# Altium PCB Pedal_XLR.PcbDoc (part 1 of 2)
Units mm, origin at the board's own origin, x right, y up, seen from the top; angles counter-clockwise.
Board outline 129.71 x 40 mm, 4 copper layers (Top Layer, Layer 1, Layer 2, Bottom Layer), stack 1.191 mm thick; 173 components, 126 nets, 550 pads, 107 vias.
Unrouted connection lines stored in the file: 71.
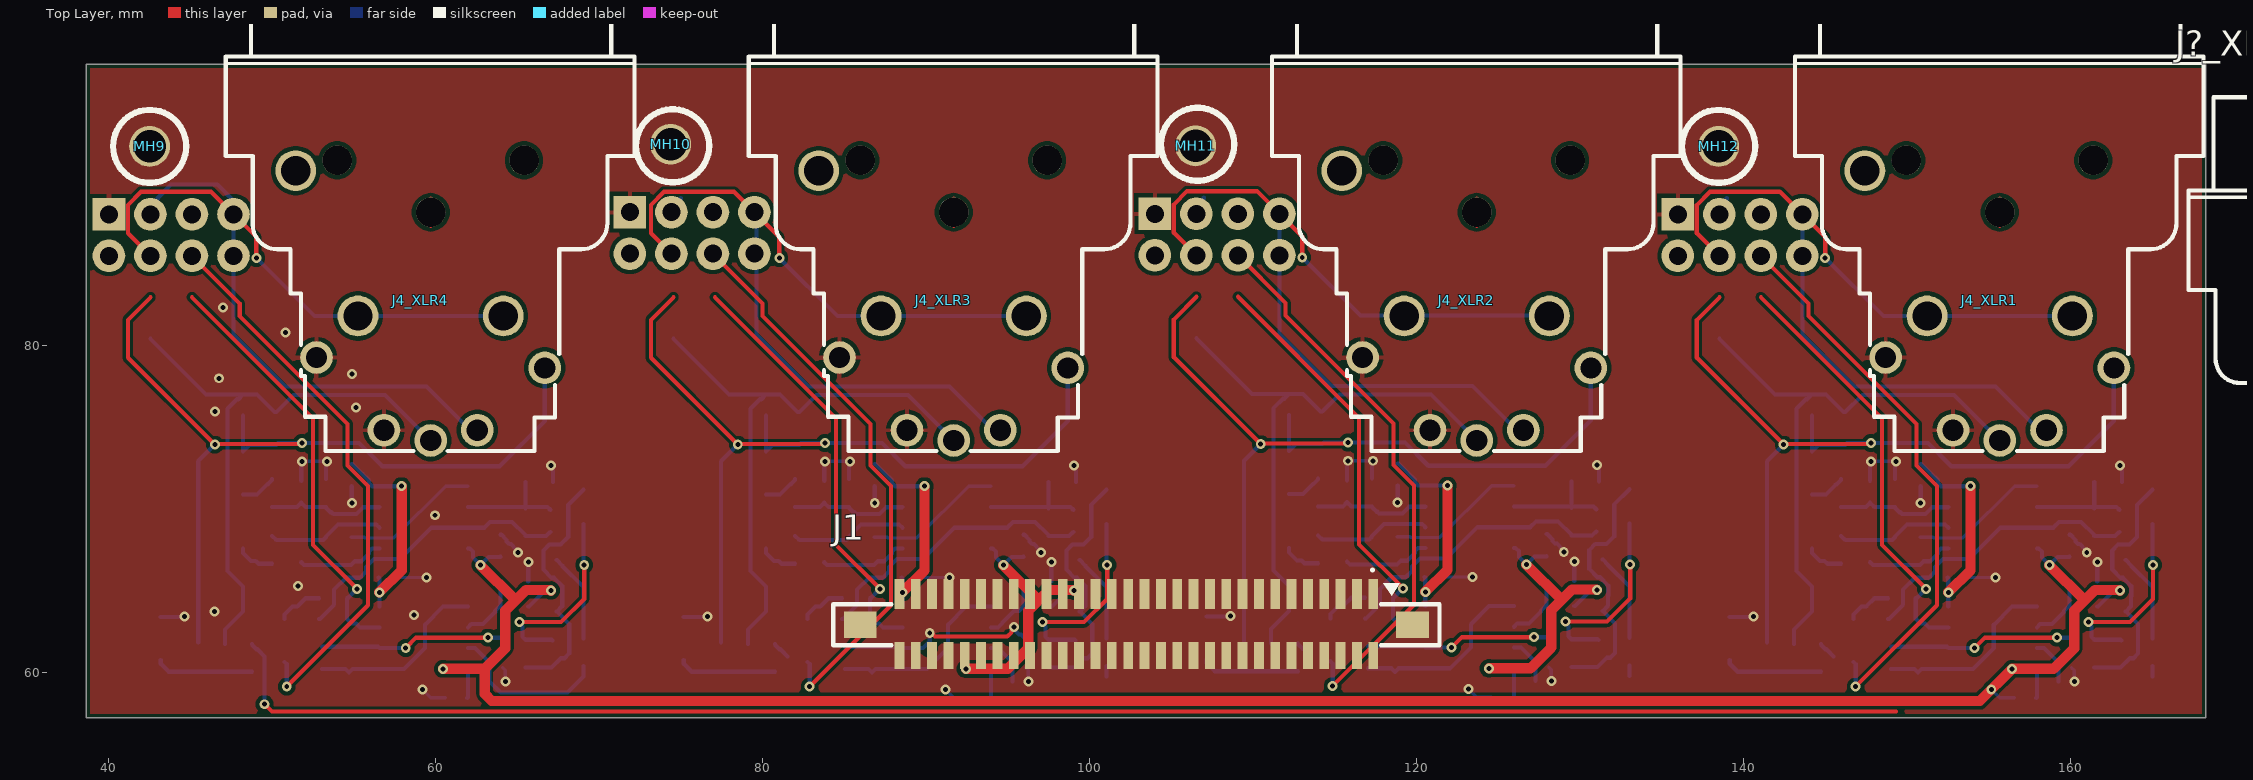
[diagram p0: Top Layer view]
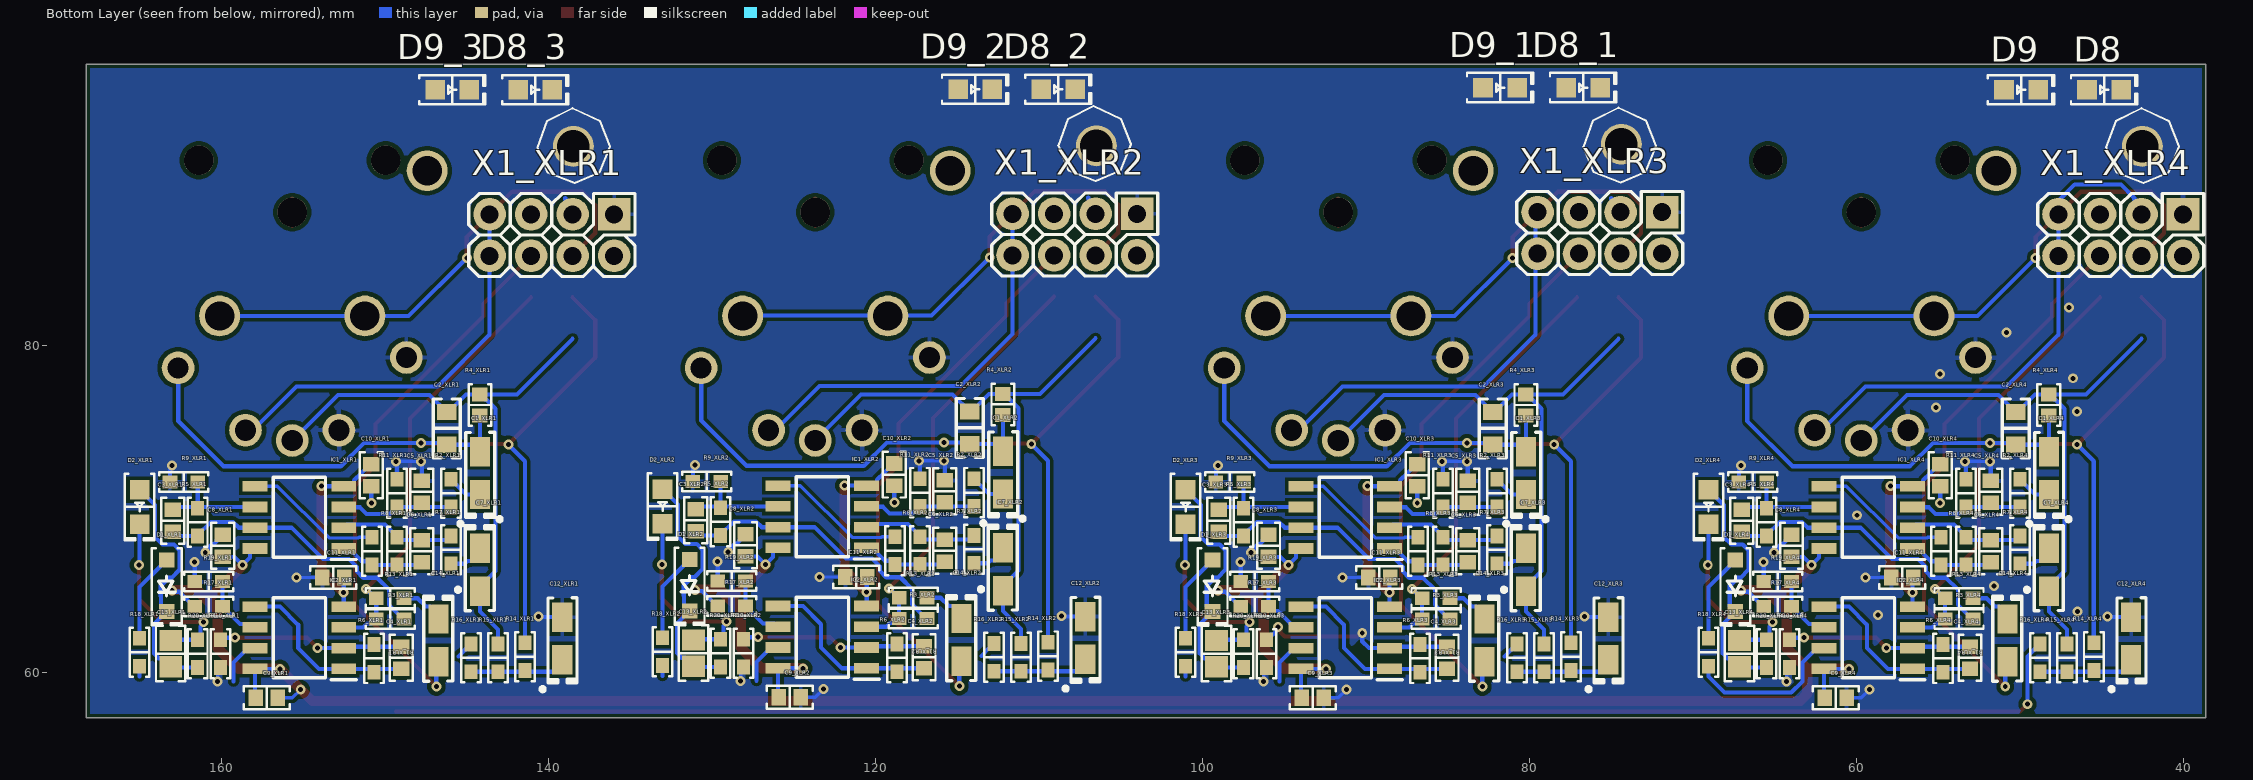
[diagram p1: Bottom Layer view, seen from below]

## Layer stack, top to bottom
Top Solder: solder mask 0.0102, Solder Resist, Dk 3.5
Top Layer: signal copper 0.0356
Dielectric 2: prepreg 0.35, PP-006, Dk 4.1
Layer 1: signal copper 0.035
Dielectric 1: dielectric 0.35, FR-4, Dk 4.8
Layer 2: signal copper 0.035
Dielectric 3: prepreg 0.35, PP-006, Dk 4.1
Bottom Layer: signal copper 0.0356
Bottom Solder: solder mask 0.0102, Solder Resist, Dk 3.5

## Board outline
38.608,57.201 38.608,97.201 168.315,97.201 168.315,57.201

## Design rules (kind name [scope] priority, off if disabled: settings)
BoardOutlineClearance [All] p1: gap=0.254 ignorepadtopadclearanceinfootprint=FALSE except(0: Arc-SplitContinuation Track-SplitContinuation SMDPad-SplitContinuation THPad-SplitContinuation Via-SplitContinuation Fill-SplitContinuation Poly-SplitContinuation Region-SplitContinuation Text-SplitContinuation)
Clearance [All] p1: gap=0.254 ignorepadtopadclearanceinfootprint=FALSE except(0.203: Arc-Arc Arc-Track Arc-SMDPad Arc-Fill Arc-Poly Arc-Region Track-Track Track-SMDPad Track-Fill Track-Poly Track-Region SMDPad-SMDPad SMDPad-Fill SMDPad-Poly SMDPad-Region)
PolygonConnect [All] p1: thpad.connectstyle=Relief thpad.reliefconductorwidth=0.254 thpad.reliefentries=4 thpad.polygonreliefangle="90 Angle" thpad.airgapwidth=0.254 smdpad.connectstyle=Relief smdpad.reliefconductorwidth=0.254 smdpad.reliefentries=4 smdpad.polygonreliefangle="90 Angle" smdpad.airgapwidth=0.254 via.connectstyle=Direct via.reliefconductorwidth=0.254 via.reliefentries=4 via.polygonreliefangle="90 Angle" via.airgapwidth=0.254
RoomDefinition XLR3 [InComponentClass('XLR3')] p1: confinementstyle=ConfineIn formatcopy=TRUE lockcomponents=FALSE outline 72.921,78.767 72.921,89.635 78.774,89.635 78.774,105.536 104.536,105.536 104.536,72.815 102.272,72.815 102.272,67.743 102.022,67.743 102.022,59.385 100.367,59.385 100.367,59.096 95.268,59.096 95.268,59.074 94.985,59.074 94.985,57.391 91.527,57.391 91.527,58.45 73.801,58.45 73.801,78.767
RoomDefinition XLR4 [InComponentClass('XLR4')] p2: confinementstyle=ConfineIn formatcopy=TRUE lockcomponents=FALSE outline 40.921,78.767 40.921,89.635 46.774,89.635 46.774,105.536 72.536,105.536 72.536,72.815 70.272,72.815 70.272,67.743 70.022,67.743 70.022,59.385 68.367,59.385 68.367,59.096 63.268,59.096 63.268,59.074 62.985,59.074 62.985,57.391 59.527,57.391 59.527,58.45 41.801,58.45 41.801,78.767
RoomDefinition XLR2 [InComponentClass('XLR2')] p3: confinementstyle=ConfineIn formatcopy=TRUE lockcomponents=FALSE outline 104.921,78.799 104.921,89.667 110.774,89.667 110.774,105.568 136.536,105.568 136.536,72.847 134.272,72.847 134.272,67.775 134.022,67.775 134.022,59.417 132.367,59.417 132.367,59.128 127.268,59.128 127.268,59.106 126.985,59.106 126.985,57.423 123.527,57.423 123.527,58.482 105.801,58.482 105.801,78.799
RoomDefinition XLR1 [InComponentClass('XLR1')] p4: confinementstyle=ConfineIn formatcopy=TRUE lockcomponents=FALSE outline 136.921,78.767 136.921,89.635 142.774,89.635 142.774,105.536 168.536,105.536 168.536,72.815 166.272,72.815 166.272,67.743 166.022,67.743 166.022,59.385 164.367,59.385 164.367,59.096 159.268,59.096 159.268,59.074 158.985,59.074 158.985,57.391 155.527,57.391 155.527,58.45 137.801,58.45 137.801,78.767
RoutingVias [All] p1: holewidth=0.305 width=0.61 viastyle="Through Hole" minholewidth=0.305 minwidth=0.61 maxholewidth=0.305 maxwidth=0.61
SolderMaskExpansion [All] p1: expansion=0.102 istentingtop=FALSE
Width [All] p1: maxlimit=0.635 minlimit=0.203 preferedwidth=0.203
30 further rules are at their usual default settings.

## Classes and differential pairs
channel class XLR: XLR1 XLR2 XLR3 XLR4
component class XLR4: C1_XLR4 C2_XLR4 C3_XLR4 C4_XLR4 C5_XLR4 C6_XLR4 C7_XLR4 C8_XLR4 C9_XLR4 C10_XLR4 C11_XLR4 C12_XLR4 C13_XLR4 C14_XLR4 D1_XLR4 D2_XLR4 IC1_XLR4 IC2_XLR4 J4_XLR4 R1_XLR4 R2_XLR4 R3_XLR4 R4_XLR4 R5_XLR4 R6_XLR4 R7_XLR4 R8_XLR4 R9_XLR4 R10_XLR4 R11_XLR4 R13_XLR4 R14_XLR4 R15_XLR4 R16_XLR4 R17_XLR4 R18_XLR4 R19_XLR4 R20_XLR4 X1_XLR4
component class XLR3: C1_XLR3 C2_XLR3 C3_XLR3 C4_XLR3 C5_XLR3 C6_XLR3 C7_XLR3 C8_XLR3 C9_XLR3 C10_XLR3 C11_XLR3 C12_XLR3 C13_XLR3 C14_XLR3 D1_XLR3 D2_XLR3 IC1_XLR3 IC2_XLR3 J4_XLR3 R1_XLR3 R2_XLR3 R3_XLR3 R4_XLR3 R5_XLR3 R6_XLR3 R7_XLR3 R8_XLR3 R9_XLR3 R10_XLR3 R11_XLR3 R13_XLR3 R14_XLR3 R15_XLR3 R16_XLR3 R17_XLR3 R18_XLR3 R19_XLR3 R20_XLR3 X1_XLR3
component class XLR2: C1_XLR2 C2_XLR2 C3_XLR2 C4_XLR2 C5_XLR2 C6_XLR2 C7_XLR2 C8_XLR2 C9_XLR2 C10_XLR2 C11_XLR2 C12_XLR2 C13_XLR2 C14_XLR2 D1_XLR2 D2_XLR2 IC1_XLR2 IC2_XLR2 J4_XLR2 R1_XLR2 R2_XLR2 R3_XLR2 R4_XLR2 R5_XLR2 R6_XLR2 R7_XLR2 R8_XLR2 R9_XLR2 R10_XLR2 R11_XLR2 R13_XLR2 R14_XLR2 R15_XLR2 R16_XLR2 R17_XLR2 R18_XLR2 R19_XLR2 R20_XLR2 X1_XLR2
component class XLR1: C1_XLR1 C2_XLR1 C3_XLR1 C4_XLR1 C5_XLR1 C6_XLR1 C7_XLR1 C8_XLR1 C9_XLR1 C10_XLR1 C11_XLR1 C12_XLR1 C13_XLR1 C14_XLR1 D1_XLR1 D2_XLR1 IC1_XLR1 IC2_XLR1 J4_XLR1 R1_XLR1 R2_XLR1 R3_XLR1 R4_XLR1 R5_XLR1 R6_XLR1 R7_XLR1 R8_XLR1 R9_XLR1 R10_XLR1 R11_XLR1 R13_XLR1 R14_XLR1 R15_XLR1 R16_XLR1 R17_XLR1 R18_XLR1 R19_XLR1 R20_XLR1 X1_XLR1
component class Pedal_XLR: J1

## Components (designator, comment, footprint, x,y, rotation, side; value= is the part's Value field where it differs from the comment)
C1_XLR1 "10µF" "CAP POL 1206_3216" 144.215,72.176 r90 bottom (schematic designator C1)
C1_XLR2 "10µF" "CAP POL 1206_3216" 112.215,72.208 r90 bottom (schematic designator C1)
C1_XLR3 "10µF" "CAP POL 1206_3216" 80.215,72.176 r90 bottom (schematic designator C1)
C1_XLR4 "10µF" "CAP POL 1206_3216" 48.215,72.176 r90 bottom (schematic designator C1)
C2_XLR1 "10000 pF" "MURATA GRM188 0603_1608" 146.247,74.914 r270 bottom (schematic designator C2)
C2_XLR2 "10000 pF" "MURATA GRM188 0603_1608" 114.247,74.946 r270 bottom (schematic designator C2)
C2_XLR3 "10000 pF" "MURATA GRM188 0603_1608" 82.247,74.914 r270 bottom (schematic designator C2)
C2_XLR4 "10000 pF" "MURATA GRM188 0603_1608" 50.247,74.914 r270 bottom (schematic designator C2)
C3_XLR1 "22 pF" "CAP 0603_1608" 163.011,69.255 r90 bottom (schematic designator C3)
C3_XLR2 "22 pF" "CAP 0603_1608" 131.011,69.287 r90 bottom (schematic designator C3)
C3_XLR3 "22 pF" "CAP 0603_1608" 99.011,69.255 r90 bottom (schematic designator C3)
C3_XLR4 "22 pF" "CAP 0603_1608" 67.011,69.255 r90 bottom (schematic designator C3)
C4_XLR1 "22 pF" "CAP 0603_1608" 149.041,60.873 r90 bottom (schematic designator C4)
C4_XLR2 "22 pF" "CAP 0603_1608" 117.041,60.905 r90 bottom (schematic designator C4)
C4_XLR3 "22 pF" "CAP 0603_1608" 85.041,60.873 r90 bottom (schematic designator C4)
C4_XLR4 "22 pF" "CAP 0603_1608" 53.041,60.873 r90 bottom (schematic designator C4)
C5_XLR1 "22 pF" "CAP 0603_1608" 147.771,71.033 r270 bottom (schematic designator C5)
C5_XLR2 "22 pF" "CAP 0603_1608" 115.771,71.065 r270 bottom (schematic designator C5)
C5_XLR3 "22 pF" "CAP 0603_1608" 83.771,71.033 r270 bottom (schematic designator C5)
C5_XLR4 "22 pF" "CAP 0603_1608" 51.771,71.033 r270 bottom (schematic designator C5)
C6_XLR1 "22 pF" "CAP 0603_1608" 147.771,67.397 r90 bottom (schematic designator C6)
C6_XLR2 "22 pF" "CAP 0603_1608" 115.771,67.429 r90 bottom (schematic designator C6)
C6_XLR3 "22 pF" "CAP 0603_1608" 83.771,67.397 r90 bottom (schematic designator C6)
C6_XLR4 "22 pF" "CAP 0603_1608" 51.771,67.397 r90 bottom (schematic designator C6)
C7_XLR1 "10µF" "CAP POL 1206_3216" 144.215,66.254 r270 bottom (schematic designator C7)
C7_XLR2 "10µF" "CAP POL 1206_3216" 112.215,66.286 r270 bottom (schematic designator C7)
C7_XLR3 "10µF" "CAP POL 1206_3216" 80.215,66.254 r270 bottom (schematic designator C7)
C7_XLR4 "10µF" "CAP POL 1206_3216" 48.215,66.254 r270 bottom (schematic designator C7)
C8_XLR1 "0.1 µF" "CAP 0603_1608" 159.963,67.731 r90 bottom (schematic designator C8)
C8_XLR2 "0.1 µF" "CAP 0603_1608" 127.963,67.763 r90 bottom (schematic designator C8)
C8_XLR3 "0.1 µF" "CAP 0603_1608" 95.963,67.731 r90 bottom (schematic designator C8)
C8_XLR4 "0.1 µF" "CAP 0603_1608" 63.963,67.731 r90 bottom (schematic designator C8)
C9_XLR1 "0.1 µF" "CAP 0603_1608" 157.256,58.42 r180 bottom (schematic designator C9)
C9_XLR2 "0.1 µF" "CAP 0603_1608" 125.256,58.452 r180 bottom (schematic designator C9)
C9_XLR3 "0.1 µF" "CAP 0603_1608" 93.256,58.42 r180 bottom (schematic designator C9)
C9_XLR4 "0.1 µF" "CAP 0603_1608" 61.256,58.42 r180 bottom (schematic designator C9)
C10_XLR1 "0.1 µF" "CAP 0603_1608" 150.864,72.049 r90 bottom (schematic designator C10)
C10_XLR2 "0.1 µF" "CAP 0603_1608" 118.864,72.081 r90 bottom (schematic designator C10)
C10_XLR3 "0.1 µF" "CAP 0603_1608" 86.864,72.049 r90 bottom (schematic designator C10)
C10_XLR4 "0.1 µF" "CAP 0603_1608" 54.864,72.049 r90 bottom (schematic designator C10)
C11_XLR1 "0.1 µF" "CAP 0603_1608" 153.192,65.786 r180 bottom (schematic designator C11)
C11_XLR2 "0.1 µF" "CAP 0603_1608" 121.192,65.818 r180 bottom (schematic designator C11)
C11_XLR3 "0.1 µF" "CAP 0603_1608" 89.192,65.786 r180 bottom (schematic designator C11)
C11_XLR4 "0.1 µF" "CAP 0603_1608" 57.192,65.786 r180 bottom (schematic designator C11)
C12_XLR1 "10µF" "CAP POL 1206_3216" 139.18,62.054 r90 bottom (schematic designator C12)
C12_XLR2 "10µF" "CAP POL 1206_3216" 107.18,62.086 r90 bottom (schematic designator C12)
C12_XLR3 "10µF" "CAP POL 1206_3216" 75.18,62.054 r90 bottom (schematic designator C12)
C12_XLR4 "10µF" "CAP POL 1206_3216" 43.18,62.054 r90 bottom (schematic designator C12)
C13_XLR1 "1 µF" "CAP 0805_2012" 163.138,61.125 r270 bottom (schematic designator C13)
C13_XLR2 "1 µF" "CAP 0805_2012" 131.138,61.157 r270 bottom (schematic designator C13)
C13_XLR3 "1 µF" "CAP 0805_2012" 99.138,61.125 r270 bottom (schematic designator C13)
C13_XLR4 "1 µF" "CAP 0805_2012" 67.138,61.125 r270 bottom (schematic designator C13)
C14_XLR1 "10µF" "CAP POL 1206_3216" 146.755,61.936 r270 bottom (schematic designator C14)
C14_XLR2 "10µF" "CAP POL 1206_3216" 114.755,61.968 r270 bottom (schematic designator C14)
C14_XLR3 "10µF" "CAP POL 1206_3216" 82.755,61.936 r270 bottom (schematic designator C14)
C14_XLR4 "10µF" "CAP POL 1206_3216" 50.755,61.936 r270 bottom (schematic designator C14)
D1_XLR1 "1N4148W-TP" SOD-123 163.392,65.278 r270 bottom (schematic designator D1)
D1_XLR2 "1N4148W-TP" SOD-123 131.392,65.31 r270 bottom (schematic designator D1)
D1_XLR3 "1N4148W-TP" SOD-123 99.392,65.278 r270 bottom (schematic designator D1)
D1_XLR4 "1N4148W-TP" SOD-123 67.392,65.278 r270 bottom (schematic designator D1)
D2_XLR1 "Red" "LED 0805_2012 RED" 165.043,70.104 r270 bottom (schematic designator D2)
D2_XLR2 "Red" "LED 0805_2012 RED" 133.043,70.136 r270 bottom (schematic designator D2)
D2_XLR3 "Red" "LED 0805_2012 RED" 101.043,70.104 r270 bottom (schematic designator D2)
D2_XLR4 "Red" "LED 0805_2012 RED" 69.043,70.104 r270 bottom (schematic designator D2)
D8 "Red" "LED 0805_2012 RED" 44.831,95.631 r180 bottom
D8_1 "Red" "LED 0805_2012 RED" 76.708,95.758 r180 bottom
D8_2 "Red" "LED 0805_2012 RED" 108.831,95.663 r180 bottom
D8_3 "Red" "LED 0805_2012 RED" 140.831,95.631 r180 bottom
D9 "Red" "LED 0805_2012 RED" 49.911,95.631 r180 bottom
D9_1 "Red" "LED 0805_2012 RED" 81.788,95.758 r180 bottom
D9_2 "Red" "LED 0805_2012 RED" 113.911,95.663 r180 bottom
D9_3 "Red" "LED 0805_2012 RED" 145.911,95.631 r180 bottom
IC1_XLR1 "NE5532DRE4" SOIC127P600X175-8N 155.264,69.469 r0 bottom (schematic designator IC1)
IC1_XLR2 "NE5532DRE4" SOIC127P600X175-8N 123.264,69.501 r0 bottom (schematic designator IC1)
IC1_XLR3 "NE5532DRE4" SOIC127P600X175-8N 91.264,69.469 r0 bottom (schematic designator IC1)
IC1_XLR4 "NE5532DRE4" SOIC127P600X175-8N 59.264,69.469 r0 bottom (schematic designator IC1)
IC2_XLR1 "NE5532DRE4" SOIC127P600X175-8N 155.264,62.103 r0 bottom (schematic designator IC2)
IC2_XLR2 "NE5532DRE4" SOIC127P600X175-8N 123.264,62.135 r0 bottom (schematic designator IC2)
IC2_XLR3 "NE5532DRE4" SOIC127P600X175-8N 91.264,62.103 r0 bottom (schematic designator IC2)
IC2_XLR4 "NE5532DRE4" SOIC127P600X175-8N 59.264,62.103 r0 bottom (schematic designator IC2)
J1 "3-1734248-0" 317342480 102.87,63.246 r0 top
J4_XLR1 "NCJ6FA-H" NCJ6FA-H 155.702,88.138 r0 top locked (schematic designator J4)
J4_XLR2 "NCJ6FA-H" NCJ6FA-H 123.698,88.138 r0 top locked (schematic designator J4)
J4_XLR3 "NCJ6FA-H" NCJ6FA-H 91.694,88.138 r0 top locked (schematic designator J4)
J4_XLR4 "NCJ6FA-H" NCJ6FA-H 59.69,88.138 r0 top locked (schematic designator J4)
J?_XLR1 "NCJ6FA-H" ACJC10HL 179.789,79.952 r0 top (schematic designator J?)
J?_XLR2 "NCJ6FA-H" ACJC10HL 183.007,118.516 r180 top (schematic designator J?)
J?_XLR3 "NCJ6FA-H" ACJC10HL 183.007,161.519 r180 top (schematic designator J?)
J?_XLR4 "NCJ6FA-H" ACJC10HL 183.007,204.521 r180 top (schematic designator J?)
MH9 "MountingHole" Hole_2.5mm 42.498,92.168 r0 top
MH10 "MountingHole" Hole_2.5mm 74.375,92.295 r0 top
MH11 "MountingHole" Hole_2.5mm 106.498,92.2 r0 top
MH12 "MountingHole" Hole_2.5mm 138.498,92.168 r0 top
R1_XLR1 "510 Ohms" "YAGEO RES 0603_1608" 150.819,67.398 r90 bottom (schematic designator R1)
R1_XLR2 "510 Ohms" "YAGEO RES 0603_1608" 118.819,67.43 r90 bottom (schematic designator R1)
R1_XLR3 "510 Ohms" "YAGEO RES 0603_1608" 86.819,67.398 r90 bottom (schematic designator R1)
R1_XLR4 "510 Ohms" "YAGEO RES 0603_1608" 54.819,67.398 r90 bottom (schematic designator R1)
R2_XLR1 "510 Ohms" "YAGEO RES 0603_1608" 145.993,70.954 r270 bottom (schematic designator R2)
R2_XLR2 "510 Ohms" "YAGEO RES 0603_1608" 113.993,70.986 r270 bottom (schematic designator R2)
R2_XLR3 "510 Ohms" "YAGEO RES 0603_1608" 81.993,70.954 r270 bottom (schematic designator R2)
R2_XLR4 "510 Ohms" "YAGEO RES 0603_1608" 49.993,70.954 r270 bottom (schematic designator R2)
R3_XLR1 "5.1 kOhms" "YAGEO RES 0603_1608" 149.715,63.246 r0 bottom (schematic designator R3)
R3_XLR2 "5.1 kOhms" "YAGEO RES 0603_1608" 117.715,63.278 r0 bottom (schematic designator R3)
R3_XLR3 "5.1 kOhms" "YAGEO RES 0603_1608" 85.715,63.246 r0 bottom (schematic designator R3)
R3_XLR4 "5.1 kOhms" "YAGEO RES 0603_1608" 53.715,63.246 r0 bottom (schematic designator R3)
R4_XLR1 "" "RES 0603_1608" 144.215,76.342 r90 bottom value="1 MOhms" (schematic designator R4)
R4_XLR2 "" "RES 0603_1608" 112.215,76.374 r90 bottom value="1 MOhms" (schematic designator R4)
R4_XLR3 "" "RES 0603_1608" 80.215,76.342 r90 bottom value="1 MOhms" (schematic designator R4)
R4_XLR4 "" "RES 0603_1608" 48.215,76.342 r90 bottom value="1 MOhms" (schematic designator R4)
R5_XLR1 "150 kOhms" "YAGEO RES 0603_1608" 161.487,69.176 r270 bottom (schematic designator R5)
R5_XLR2 "150 kOhms" "YAGEO RES 0603_1608" 129.487,69.208 r270 bottom (schematic designator R5)
R5_XLR3 "150 kOhms" "YAGEO RES 0603_1608" 97.487,69.176 r270 bottom (schematic designator R5)
R5_XLR4 "150 kOhms" "YAGEO RES 0603_1608" 65.487,69.176 r270 bottom (schematic designator R5)
R6_XLR1 "5.1 kOhms" "YAGEO RES 0603_1608" 150.692,60.833 r270 bottom (schematic designator R6)
R6_XLR2 "5.1 kOhms" "YAGEO RES 0603_1608" 118.692,60.865 r270 bottom (schematic designator R6)
R6_XLR3 "5.1 kOhms" "YAGEO RES 0603_1608" 86.692,60.833 r270 bottom (schematic designator R6)
R6_XLR4 "5.1 kOhms" "YAGEO RES 0603_1608" 54.692,60.833 r270 bottom (schematic designator R6)
R7_XLR1 "510 Ohms" "YAGEO RES 0603_1608" 145.993,67.476 r90 bottom (schematic designator R7)
R7_XLR2 "510 Ohms" "YAGEO RES 0603_1608" 113.993,67.508 r90 bottom (schematic designator R7)
R7_XLR3 "510 Ohms" "YAGEO RES 0603_1608" 81.993,67.476 r90 bottom (schematic designator R7)
R7_XLR4 "510 Ohms" "YAGEO RES 0603_1608" 49.993,67.476 r90 bottom (schematic designator R7)
R8_XLR1 "51 kOhms" "YAGEO RES 0603_1608" 149.295,67.398 r90 bottom (schematic designator R8)
R8_XLR2 "51 kOhms" "YAGEO RES 0603_1608" 117.295,67.43 r90 bottom (schematic designator R8)
R8_XLR3 "51 kOhms" "YAGEO RES 0603_1608" 85.295,67.398 r90 bottom (schematic designator R8)
R8_XLR4 "51 kOhms" "YAGEO RES 0603_1608" 53.295,67.398 r90 bottom (schematic designator R8)
R9_XLR1 "510 Ohms" "YAGEO RES 0603_1608" 162.337,71.628 r180 bottom (schematic designator R9)
R9_XLR2 "510 Ohms" "YAGEO RES 0603_1608" 130.337,71.66 r180 bottom (schematic designator R9)
R9_XLR3 "510 Ohms" "YAGEO RES 0603_1608" 98.337,71.628 r180 bottom (schematic designator R9)
R9_XLR4 "510 Ohms" "YAGEO RES 0603_1608" 66.337,71.628 r180 bottom (schematic designator R9)
R10_XLR1 "5.1 kOhms" "YAGEO RES 0603_1608" 160.09,61.126 r90 bottom (schematic designator R10)
R10_XLR2 "5.1 kOhms" "YAGEO RES 0603_1608" 128.09,61.158 r90 bottom (schematic designator R10)
R10_XLR3 "5.1 kOhms" "YAGEO RES 0603_1608" 96.09,61.126 r90 bottom (schematic designator R10)
R10_XLR4 "5.1 kOhms" "YAGEO RES 0603_1608" 64.09,61.126 r90 bottom (schematic designator R10)
R11_XLR1 "51 kOhms" "YAGEO RES 0603_1608" 149.295,70.954 r270 bottom (schematic designator R11)
R11_XLR2 "51 kOhms" "YAGEO RES 0603_1608" 117.295,70.986 r270 bottom (schematic designator R11)
R11_XLR3 "51 kOhms" "YAGEO RES 0603_1608" 85.295,70.954 r270 bottom (schematic designator R11)
R11_XLR4 "51 kOhms" "YAGEO RES 0603_1608" 53.295,70.954 r270 bottom (schematic designator R11)
R13_XLR1 "5.1 kOhms" "YAGEO RES 0603_1608" 149.715,64.516 r0 bottom (schematic designator R13)
R13_XLR2 "5.1 kOhms" "YAGEO RES 0603_1608" 117.715,64.548 r0 bottom (schematic designator R13)
R13_XLR3 "5.1 kOhms" "YAGEO RES 0603_1608" 85.715,64.516 r0 bottom (schematic designator R13)
R13_XLR4 "5.1 kOhms" "YAGEO RES 0603_1608" 53.715,64.516 r0 bottom (schematic designator R13)
R14_XLR1 "5.1 kOhms" "YAGEO RES 0603_1608" 141.466,60.95 r270 bottom (schematic designator R14)
R14_XLR2 "5.1 kOhms" "YAGEO RES 0603_1608" 109.466,60.982 r270 bottom (schematic designator R14)
R14_XLR3 "5.1 kOhms" "YAGEO RES 0603_1608" 77.466,60.95 r270 bottom (schematic designator R14)
R14_XLR4 "5.1 kOhms" "YAGEO RES 0603_1608" 45.466,60.95 r270 bottom (schematic designator R14)
R15_XLR1 "5.1 kOhms" "YAGEO RES 0603_1608" 143.117,60.872 r270 bottom (schematic designator R15)
R15_XLR2 "5.1 kOhms" "YAGEO RES 0603_1608" 111.117,60.904 r270 bottom (schematic designator R15)
R15_XLR3 "5.1 kOhms" "YAGEO RES 0603_1608" 79.117,60.872 r270 bottom (schematic designator R15)
R15_XLR4 "5.1 kOhms" "YAGEO RES 0603_1608" 47.117,60.872 r270 bottom (schematic designator R15)
R16_XLR1 "510 Ohms" "YAGEO RES 0603_1608" 144.768,60.872 r90 bottom (schematic designator R16)
R16_XLR2 "510 Ohms" "YAGEO RES 0603_1608" 112.768,60.904 r90 bottom (schematic designator R16)
R16_XLR3 "510 Ohms" "YAGEO RES 0603_1608" 80.768,60.872 r90 bottom (schematic designator R16)
R16_XLR4 "510 Ohms" "YAGEO RES 0603_1608" 48.768,60.872 r90 bottom (schematic designator R16)
R17_XLR1 "51 kOhms" "YAGEO RES 0603_1608" 160.813,64.008 r180 bottom (schematic designator R17)
R17_XLR2 "51 kOhms" "YAGEO RES 0603_1608" 128.813,64.04 r180 bottom (schematic designator R17)
R17_XLR3 "51 kOhms" "YAGEO RES 0603_1608" 96.813,64.008 r180 bottom (schematic designator R17)
R17_XLR4 "51 kOhms" "YAGEO RES 0603_1608" 64.813,64.008 r180 bottom (schematic designator R17)
R18_XLR1 "510 Ohms" "YAGEO RES 0603_1608" 165.043,61.214 r90 bottom (schematic designator R18)
R18_XLR2 "510 Ohms" "YAGEO RES 0603_1608" 133.043,61.246 r90 bottom (schematic designator R18)
R18_XLR3 "510 Ohms" "YAGEO RES 0603_1608" 101.043,61.214 r90 bottom (schematic designator R18)
R18_XLR4 "510 Ohms" "YAGEO RES 0603_1608" 69.043,61.214 r90 bottom (schematic designator R18)
R19_XLR1 "51 kOhms" "YAGEO RES 0603_1608" 160.813,65.532 r0 bottom (schematic designator R19)
R19_XLR2 "51 kOhms" "YAGEO RES 0603_1608" 128.813,65.564 r0 bottom (schematic designator R19)
R19_XLR3 "51 kOhms" "YAGEO RES 0603_1608" 96.813,65.532 r0 bottom (schematic designator R19)
R19_XLR4 "51 kOhms" "YAGEO RES 0603_1608" 64.813,65.532 r0 bottom (schematic designator R19)
R20_XLR1 "5.1 kOhms" "YAGEO RES 0603_1608" 161.487,61.126 r270 bottom (schematic designator R20)
R20_XLR2 "5.1 kOhms" "YAGEO RES 0603_1608" 129.487,61.158 r270 bottom (schematic designator R20)
R20_XLR3 "5.1 kOhms" "YAGEO RES 0603_1608" 97.487,61.126 r270 bottom (schematic designator R20)
R20_XLR4 "5.1 kOhms" "YAGEO RES 0603_1608" 65.487,61.126 r270 bottom (schematic designator R20)
X1_XLR1 "Connector, 8pin, 2.54mm, 500VAC, 3A" "CON: PLD-8" 139.815,86.741 r0 bottom (schematic designator X1)
X1_XLR2 "Connector, 8pin, 2.54mm, 500VAC, 3A" "CON: PLD-8" 107.815,86.773 r0 bottom (schematic designator X1)
X1_XLR3 "Connector, 8pin, 2.54mm, 500VAC, 3A" "CON: PLD-8" 75.692,86.868 r0 bottom (schematic designator X1)
X1_XLR4 "Connector, 8pin, 2.54mm, 500VAC, 3A" "CON: PLD-8" 43.815,86.741 r0 bottom (schematic designator X1)

## Footprints (in the part's own frame and the unit in brackets; to place one, negate y for a bottom-side part, rotate by r counter-clockwise, add the part's x,y. Pads: shape width x height; smd on the part's side, far side on the other; paste and mask are expansions set on the pad)
317342480 [mm]
  rect 0.6x1.85 smd: 1(14.5,1.525) 3(13.5,1.525) 5(12.5,1.525) 7(11.5,1.525) 9(10.5,1.525) 11(9.5,1.525) 13(8.5,1.525) 15(7.5,1.525) 17(6.5,1.525) 19(5.5,1.525) 21(4.5,1.525) 23(3.5,1.525) 25(2.5,1.525) 27(1.5,1.525) 29(0.5,1.525) 31(-0.5,1.525) 33(-1.5,1.525) 35(-2.5,1.525) 37(-3.5,1.525) 39(-4.5,1.525) 41(-5.5,1.525) 43(-6.5,1.525) 45(-7.5,1.525) 47(-8.5,1.525) 49(-9.5,1.525) 51(-10.5,1.525) 53(-11.5,1.525) 55(-12.5,1.525) 57(-13.5,1.525) 59(-14.5,1.525)
  rect 0.6x1.65 smd: 2(14.5,-2.225) 4(13.5,-2.225) 6(12.5,-2.225) 8(11.5,-2.225) 10(10.5,-2.225) 12(9.5,-2.225) 14(8.5,-2.225) 16(7.5,-2.225) 18(6.5,-2.225) 20(5.5,-2.225) 22(4.5,-2.225) 24(3.5,-2.225) 26(2.5,-2.225) 28(1.5,-2.225) 30(0.5,-2.225) 32(-0.5,-2.225) 34(-1.5,-2.225) 36(-2.5,-2.225) 38(-3.5,-2.225) 40(-4.5,-2.225) 42(-5.5,-2.225) 44(-6.5,-2.225) 46(-7.5,-2.225) 48(-8.5,-2.225) 50(-9.5,-2.225) 52(-10.5,-2.225) 54(-11.5,-2.225) 56(-12.5,-2.225) 58(-13.5,-2.225) 60(-14.5,-2.225)
  rect 2x1.6 smd paste+0 mask+0.05: 31(-16.9,-0.35) 32(16.9,-0.35)
  silkscreen extent -18.54,-1.6 18.54,3.05, body extent -18.7,-2.68 18.7,2.17, height 5.68
ACJC10HL [mm] "https://www.digikey.nl/en/products/detail/amphenol-sine-systems-corp/ACJC10HL-BULK/13577736?s=N4IgTCBcDaIIIGEBSCCMAGAEgGRAXQF8g"
  round 2 hole 1.2 paste-2539.97 mask+0.051: 1(-6.1,-8.875) 2(6.1,-8.875) 3(0,-8.875) G(0,-1.575) GS(-1.1,-5.225) R(-5.2,-4.975) RS(-3,-15.475) S(5.2,-1.575) SS(3,-4.975) TS(3,-15.475) Y(9.2,-15.475)
  round 2.1 hole 1.8 unplated paste-2539.97: ""(-4,2.525)
  silkscreen extent -12.53,-14.61 12.46,15.23, body extent -13.6,-15.85 13.39,16.75, height 29.34
"CAP 0603_1608" [mm] "Chip Capacitor, 2-Leads, Body 1.60x0.80mm, IPC Medium Density"
  rect 0.9x1 smd: 1(-0.675,0) 2(0.675,0)
  silkscreen extent -1.4,-0.7 1.4,0.7, body extent -0.8,-0.41 0.8,0.41, height 0.82
"CAP 0805_2012" [mm] "Chip Capacitor, 2-Leads, Body 2.00x1.20mm, IPC Medium Density"
  rect 1.3x1.4 smd: 1(-0.8,0) 2(0.8,0)
  silkscreen extent -1.7,-0.9 1.7,0.9, body extent -1,-0.64 1,0.64, height 1.26
"CAP POL 1206_3216" [mm] "Molded Capacitor, 2-Leads, Body 3.20x1.6mm, IPC Medium Density"
  rect 1.8x1.23 smd: 1(-1.31,0) 2(1.31,0)
  silkscreen extent -3.22,-0.9 2.5,1.33, body extent -1.72,-0.85 1.71,0.85, height 1.7
"CON: PLD-8" [mm] "PLD-40 8 pin header"
  rect 2x2 hole 1.1: 1(-3.81,-1.27)
  round 2 hole 1.1: 2(-3.81,1.27) 3(-1.27,-1.27) 4(-1.27,1.27) 5(1.27,-1.27) 6(1.27,1.27) 7(3.81,-1.27) 8(3.81,1.27)
  silkscreen extent -5.08,-2.54 5.08,2.54, body extent -5.13,-2.55 5.03,2.53, height 8.54
Hole_2.5mm [mm]
  round 2.5 hole 2: 0(0,0)
  body extent -0.5,-0.5 0.5,0.5, height 0.5
"LED 0805_2012 RED" [mm] "Chip Diode, 2-Leads, Body 2.00x1.25mm, IPC Medium Density"
  rect 1.2x1.2 smd: 1(-1.05,0) 2(1.05,0)
  silkscreen extent -2.03,-0.9 2.03,0.9, body extent -1,-0.63 1,0.63, height 0.9
"MURATA GRM188 0603_1608" [mm] "Chip Capacitor, 2-Leads, Body 1.60x0.80mm"
  rect 1x1.2 smd: 1(-1,0) 2(1,0)
  silkscreen extent -1.8,-0.83 1.8,0.83, body extent -0.9,-0.5 0.9,0.5, height 1
NCJ6FA-H [mm] "Neutrik NCJ6FA-H"
  round 2 hole 1.3 paste-2539.97 mask+0.051: 1(-6.985,-8.89) 2(6.985,-9.525) 3(0,-13.97) 4(-2.858,-13.335) 5(2.858,-13.335)
  round 2.5 hole 1.8 paste-2539.97 mask+0.051: 6(-4.445,-6.35) 7(4.445,-6.35) 8(-8.255,2.54)
  round 1.8 hole 1.8 unplated paste-2539.97: ""(-5.715,3.175) ""(0,0) ""(5.715,3.175)
  silkscreen extent -12.53,-14.61 12.47,15.23, body extent -12.53,-15.07 12.46,17.14, height 29.41
"RES 0603_1608" [mm] "Chip Resistor, 2-Leads, Body 1.60x0.80mm, IPC Medium Density"
  rect 0.85x0.95 smd: 1(-0.65,0) 2(0.65,0)
  silkscreen extent -1.27,-0.7 1.27,0.7, body extent -0.8,-0.4 0.8,0.4, height 0.45
SOD-123 [mm] "SOD, 2-Leads, Body 1.55x3.70mm, IPC Medium Density"
  rect 0.9x0.95 smd: 1(-1.575,0) 2(1.575,0)
  silkscreen extent -2.3,-0.92 2.41,0.92, body extent -1.86,-0.78 1.86,0.77, height 1.35
SOIC127P600X175-8N [mm]
  rect 1.525x0.65 smd: 1(-2.712,1.905) 2(-2.712,0.635) 3(-2.712,-0.635) 4(-2.712,-1.905) 5(2.712,-1.905) 6(2.712,-0.635) 7(2.712,0.635) 8(2.712,1.905)
  silkscreen extent -3.47,-2.45 1.6,2.58, body extent -3,-2.45 3,2.45, height 1.75
"YAGEO RES 0603_1608" [mm] "Chip Resistor, 2-Leads, Body 1.60x0.80mm"
  rect 0.9x0.8 smd: 1(-0.85,0) 2(0.85,0)
  silkscreen extent -1.5,-0.6 1.5,0.6, body extent -0.8,-0.4 0.8,0.4, height 0.45

## Part data
C1_XLR1 C1_XLR2 C1_XLR3 C1_XLR4 C7_XLR1 C7_XLR2 C7_XLR3 C7_XLR4 C12_XLR1 C12_XLR2 C12_XLR3 C12_XLR4 C14_XLR1 C14_XLR2 C14_XLR3 C14_XLR4: library part T491A106K010AT, "CAP TANT 10UF 10% 10V 1206", Device Package="1206 (3216 Metric)", ESR (Equivalent Series Resistance)=3.8Ohm, Lifetime @ Temp.="2000 Hrs @ 125°C", Manufacturer=KEMET, Manufacturer Size Code=A, Operating Temperature="-55°C ~ 125°C", Supplier Part Number 1=399-3684-1-ND, Tolerance=±10%, Voltage - Rated=10V, Capacitance=10µF, ComponentLink1Description=Datasheet, ComponentLink1URL=https://api.kemet.com/component-edge/download/datasheet/T491A106K010AT.pdf, ComponentLink2Description="DigiKey Link", ComponentLink2URL=http://digikey.com/product-detail/en/kemet/T491A106K010AT/399-3684-1-ND/819009, Features="General Purpose", Height - Seated (Max)="0.071\" (1.80mm)", LastUpdated="9/2/2020 1:15:58 AM", Lifecycle Status=Active, Minimum Order=1, Mounting Type="Surface Mount", Package / Case="1206 (3216 Metric)", Packaging=TapeAndReel, Part Number=T491A106K010AT, Part Status=Active, PartId=330, Price=0.07, Series=T491, Size / Dimension="0.126\" L x 0.063\" W (3.20mm x 1.60mm)", Supplier 1=DigiKey, Type=Molded
C2_XLR1 C2_XLR2 C2_XLR3 C2_XLR4: library part GRM1885C1H103JA01D, "CAP CER 10000PF 50V C0G/NP0 0603", Device Package="0603 (1608 Metric)", Manufacturer="Murata Electronics", Operating Temperature="-55°C ~ 125°C", Supplier Part Number 1=490-9666-1-ND, Temperature Coefficient="C0G, NP0", Tolerance=±5%, Voltage - Rated=50V, Applications="General Purpose", Capacitance="10000 pF", ComponentLink1Description=Datasheet, ComponentLink1URL=https://www.murata.com/~/media/webrenewal/support/library/catalog/products/capacitor/mlcc/c02e.ashx?la=en-us, ComponentLink2Description="DigiKey Link", ComponentLink2URL=https://www.digikey.com/en/products/detail/murata-electronics/GRM1885C1H103JA01D/4421555, LastUpdated="7/20/2024 12:23:21 AM", Lifecycle Status=Active, Minimum Order=1, Mounting Type="Surface Mount, MLCC", Package / Case="0603 (1608 Metric)", Packaging=TapeAndReel, Part Number=GRM1885C1H103JA01D, Part Status=Active, PartId=11077, Price=0.02, Series=GRM, Size / Dimension="0.063\" L x 0.031\" W (1.60mm x 0.80mm)", Supplier 1=DigiKey, Thickness (Max)="0.035\" (0.90mm)"
C3_XLR1 C3_XLR2 C3_XLR3 C3_XLR4 C4_XLR1 C4_XLR2 C4_XLR3 C4_XLR4 C5_XLR1 C5_XLR2 C5_XLR3 C5_XLR4 C6_XLR1 C6_XLR2 C6_XLR3 C6_XLR4: library part CC0603GRNPO9BN220, "CAP CER 22PF 50V C0G/NPO 0603", Device Package="0603 (1608 Metric)", Manufacturer=Yageo, Operating Temperature="-55°C ~ 125°C", Supplier Part Number 1=311-3925-1-ND, Temperature Coefficient="C0G, NP0", Tolerance=±2%, Voltage - Rated=50V, Applications="General Purpose", Capacitance="22 pF", ComponentLink1Description=Datasheet, ComponentLink1URL=https://www.yageo.com/upload/media/product/productsearch/datasheet/mlcc/UPY-GP_NP0_16V-to-50V_17.pdf, ComponentLink2Description="DigiKey Link", ComponentLink2URL=https://www.digikey.com/en/products/detail/yageo/CC0603GRNPO9BN220/5883550, LastUpdated="2/9/2024 8:10:28 PM", Lifecycle Status=Active, Minimum Order=1, Mounting Type="Surface Mount, MLCC", Package / Case="0603 (1608 Metric)", Packaging=TapeAndReel, Part Number=CC0603GRNPO9BN220, Part Status=Active, PartId=3677, Price=0.01, Series=CC, Size / Dimension="0.063\" L x 0.031\" W (1.60mm x 0.80mm)", Supplier 1=DigiKey, Thickness (Max)="0.035\" (0.90mm)"
C8_XLR1 C8_XLR2 C8_XLR3 C8_XLR4 C9_XLR1 C9_XLR2 C9_XLR3 C9_XLR4 C10_XLR1 C10_XLR2 C10_XLR3 C10_XLR4 C11_XLR1 C11_XLR2 C11_XLR3 C11_XLR4: library part C0603C104K5RAC7411, "CAP CER 0.1UF 50V X7R 0603", Device Package="0603 (1608 Metric)", Manufacturer=KEMET, Operating Temperature="-55°C ~ 125°C", Supplier Part Number 1=399-C0603C104K5RAC7411CT-ND, Temperature Coefficient=X7R, Tolerance=±10%, Voltage - Rated=50V, Applications="Bypass, Decoupling", Capacitance="0.1 µF", ComponentLink1Description=Datasheet, ComponentLink1URL=https://api.kemet.com/component-edge/download/datasheet/C0603C104K5RAC7411.pdf, ComponentLink2Description="DigiKey Link", ComponentLink2URL=https://www.digikey.com/en/products/detail/kemet/C0603C104K5RAC7411/3317013, LastUpdated="2/9/2024 8:10:30 PM", Lifecycle Status=Active, Minimum Order=1, Mounting Type="Surface Mount, MLCC", Package / Case="0603 (1608 Metric)", Packaging=TapeAndReel, Part Number=C0603C104K5RAC7411, Part Status=Active, PartId=2233, Price=0.01, Series="SMD Comm X7R", Size / Dimension="0.063\" L x 0.031\" W (1.60mm x 0.80mm)", Supplier 1=DigiKey, Thickness (Max)="0.035\" (0.90mm)"
C13_XLR1 C13_XLR2 C13_XLR3 C13_XLR4: library part C0805C105K4RAC7800, "CAP CER 1UF 16V X7R 0805", Device Package="0805 (2012 Metric)", Manufacturer=KEMET, Operating Temperature="-55°C ~ 125°C", Supplier Part Number 1=399-C0805C105K4RAC7800CT-ND, Temperature Coefficient=X7R, Tolerance=±10%, Voltage - Rated=16V, Applications="Bypass, Decoupling", Capacitance="1 µF", ComponentLink1Description=Datasheet, ComponentLink1URL=https://api.kemet.com/component-edge/download/datasheet/C0805C105K4RACTU.pdf, ComponentLink2Description="DigiKey Link", ComponentLink2URL=https://www.digikey.com/en/products/detail/kemet/C0805C105K4RAC7800/416047, LastUpdated="9/19/2022 1:03:30 PM", Lifecycle Status=Active, Minimum Order=1, Mounting Type="Surface Mount, MLCC", Package / Case="0805 (2012 Metric)", Packaging=TapeAndReel, Part Number=C0805C105K4RAC7800, Part Status=Active, PartId=32075, Price=0.01, Series="SMD Comm X7R", Size / Dimension="0.079\" L x 0.049\" W (2.00mm x 1.25mm)", Supplier 1=DigiKey, Thickness (Max)="0.039\" (1.00mm)"
D1_XLR1 D1_XLR2 D1_XLR3 D1_XLR4: "DIODE GEN PURP 100V 150MA SOD123", Capacitance @ Vr, F="2pF @ 0V, 1MHz", Current - Average Rectified (Io)=150mA, Current - Reverse Leakage @ Vr="1 µA @ 75 V", Manufacturer="Micro Commercial Co", Operating Temperature - Junction="-65°C ~ 150°C", Package / Case=SOD-123, Supplier Part Number 1=1N4148WTPMSCT-ND, Voltage - DC Reverse (Vr) (Max)="100 V", Voltage - Forward (Vf) (Max) @ If="1.25 V @ 150 mA", ComponentLink1Description=Datasheet, ComponentLink1URL=https://www.mccsemi.com/pdf/Products/1N4148W(SOD123).pdf, ComponentLink2Description="DigiKey Link", ComponentLink2URL=https://www.digikey.com/en/products/detail/micro-commercial-co/1N4148W-TP/717196, Diode Type=Standard, LastUpdated="6/3/2024 7:54:46 PM", Lifecycle Status=Active, Minimum Order=1, Mounting Type="Surface Mount", Packaging=TapeAndReel, Part Number=1N4148W-TP, Part Status=Active, PartId=999, Price=0.01, Reverse Recovery Time (trr)="4 ns", Series=-, Speed="Small Signal =< 200mA (Io), Any Speed", Supplier 1=DigiKey, Supplier Device Package=SOD-123
D2_XLR1 D2_XLR2 D2_XLR3 D2_XLR4 D8 D8_1 D8_2 D8_3 D9 D9_1 D9_2 D9_3: library part LSM0805412V, "LED RED CLEAR 0805 SMD", Current - Test=20mA, Device Package="0805 (2012 Metric)", Lens Color=Colorless, Manufacturer="Visual Communications Company - VCC", Millicandela Rating=100mcd, Supplier Device Package=0805, Supplier Part Number 1=28-LSM0805412VCT-ND, Voltage - Forward (Vf) (Typ)=2V, Color=Red, ComponentLink1Description=Datasheet, ComponentLink1URL=https://www.vcclite.com/wp-content/uploads/wpallimport/files/files/LSM0805452V-Green-Datasheet.pdf, ComponentLink2Description="DigiKey Link", ComponentLink2URL=https://www.digikey.com/en/products/detail/visual-communications-company-vcc/LSM0805412V/10229616, Configuration=0805, Height (Max)=0.90mm, LastUpdated="6/3/2024 8:00:06 PM", Lens Size="1.40mm x 1.20mm", Lens Style="Rectangle with Flat Top", Lens Transparency=Clear, Lifecycle Status=Active, Minimum Order=1, Mounting Type="Surface Mount", Package / Case="0805 (2012 Metric)", Packaging=TapeAndReel, Part Number=LSM0805412V, Part Status=Active, PartId=336, Price=0.11, Series=LSM0805, Size / Dimension="2.00mm L x 1.25mm W", Supplier 1=DigiKey, Viewing Angle=120°, Wavelength - Dominant=625nm, Wavelength - Peak=625nm
IC1_XLR1 IC1_XLR2 IC1_XLR3 IC1_XLR4 IC2_XLR1 IC2_XLR2 IC2_XLR3 IC2_XLR4: "Integrated Circuit", Manufacturer_Name="Texas Instruments", Mouser Part Number=595-NE5532DRE4, Arrow Part Number=NE5532DRE4, Arrow Price/Stock=https://www.arrow.com/en/products/ne5532dre4/texas-instruments, Datasheet Link=https://www.ti.com/lit/ds/symlink/ne5532.pdf?HQS=dis-mous-null-mousermode-dsf-pf-null-wwe&ts=1618482303902&ref_url=https%253A%252F%252Fwww.mouser.com%252F, Height=1.75mm, Manufacturer_Part_Number=NE5532DRE4, Mouser Price/Stock=https://www.mouser.co.uk/ProductDetail/Texas-Instruments/NE5532DRE4?qs=7nS3%252BbEUL6spPf9Rt7S6cg%3D%3D
J1: "Connector", Manufacturer_Name="TE Connectivity", Mouser Part Number=571-3-1734248-0, Arrow Part Number=3-1734248-0, Arrow Price/Stock=https://www.arrow.com/en/products/3-1734248-0/te-connectivity, Datasheet Link=https://www.te.com/commerce/DocumentDelivery/DDEController?Action=srchrtrv&DocNm=5-1773461-0_Standard_FPC_Connectors_QRG&DocType=Data%20Sheet&DocLang=English&PartCntxt=3-1734248-0&DocFormat=pdf, Height=7.7mm, Manufacturer_Part_Number=3-1734248-0, Mouser Price/Stock=https://www.mouser.co.uk/ProductDetail/TE-Connectivity/3-1734248-0?qs=rVE9j%252BL6g1a4TQRjUuGYiA%3D%3D, System=Connector
J4_XLR1 J4_XLR2 J4_XLR3 J4_XLR4 J?_XLR1 J?_XLR2 J?_XLR3 J?_XLR4: "XLR Neutrik NCJ6FA-H"
R1_XLR1 R1_XLR2 R1_XLR3 R1_XLR4 R2_XLR1 R2_XLR2 R2_XLR3 R2_XLR4 R7_XLR1 R7_XLR2 R7_XLR3 R7_XLR4 R9_XLR1 R9_XLR2 R9_XLR3 R9_XLR4 R16_XLR1 R16_XLR2 R16_XLR3 R16_XLR4 R18_XLR1 R18_XLR2 R18_XLR3 R18_XLR4: library part AC0603FR-07510RL, "RES SMD 510 OHM 1% 1/10W 0603", Device Package="0603 (1608 Metric)", Manufacturer=Yageo, Operating Temperature="-55°C ~ 155°C", Power (Watts)="0.1W, 1/10W", Ratings=AEC-Q200, Supplier Device Package=0603, Supplier Part Number 1=YAG3615CT-ND, Temperature Coefficient=±100ppm/°C, Tolerance=±1%, ComponentLink1Description=Datasheet, ComponentLink1URL=https://www.yageo.com/upload/media/product/productsearch/datasheet/rchip/PYu-AC_51_RoHS_L_7.pdf, ComponentLink2Description="DigiKey Link", ComponentLink2URL=https://www.digikey.com/en/products/detail/yageo/AC0603FR-07510RL/5896175, Composition="Thick Film", Features="Automotive AEC-Q200, Moisture Resistant", Height - Seated (Max)="0.022\" (0.55mm)", LastUpdated="7/25/2024 9:19:25 AM", Lifecycle Status=Active, Minimum Order=1, Number of Terminations=2, Package / Case="0603 (1608 Metric)", Packaging=CutTape, Part Number=AC0603FR-07510RL, Part Status=Active, PartId=15979, Price=0.01, Resistance="510 Ohms", Series=AC, Size / Dimension="0.063\" L x 0.031\" W (1.60mm x 0.80mm)", Supplier 1=DigiKey
R3_XLR1 R3_XLR2 R3_XLR3 R3_XLR4 R6_XLR1 R6_XLR2 R6_XLR3 R6_XLR4 R10_XLR1 R10_XLR2 R10_XLR3 R10_XLR4 R13_XLR1 R13_XLR2 R13_XLR3 R13_XLR4 R14_XLR1 R14_XLR2 R14_XLR3 R14_XLR4 R15_XLR1 R15_XLR2 R15_XLR3 R15_XLR4 R20_XLR1 R20_XLR2 R20_XLR3 R20_XLR4: library part AC0603FR-075K1L, "RES SMD 5.1K OHM 1% 1/10W 0603", Device Package="0603 (1608 Metric)", Manufacturer=Yageo, Operating Temperature="-55°C ~ 155°C", Power (Watts)="0.1W, 1/10W", Ratings=AEC-Q200, Supplier Device Package=0603, Supplier Part Number 1=YAG3621CT-ND, Temperature Coefficient=±100ppm/°C, Tolerance=±1%, ComponentLink1Description=Datasheet, ComponentLink1URL=https://www.yageo.com/upload/media/product/productsearch/datasheet/rchip/PYu-AC_51_RoHS_L_7.pdf, ComponentLink2Description="DigiKey Link", ComponentLink2URL=https://www.digikey.com/en/products/detail/yageo/AC0603FR-075K1L/5896209, Composition="Thick Film", Features="Automotive AEC-Q200, Moisture Resistant", Height - Seated (Max)="0.022\" (0.55mm)", LastUpdated="7/25/2024 9:19:23 AM", Lifecycle Status=Active, Minimum Order=1, Number of Terminations=2, Package / Case="0603 (1608 Metric)", Packaging=CutTape, Part Number=AC0603FR-075K1L, Part Status=Active, PartId=17442, Price=0.01, Resistance="5.1 kOhms", Series=AC, Size / Dimension="0.063\" L x 0.031\" W (1.60mm x 0.80mm)", Supplier 1=DigiKey
R4_XLR1 R4_XLR2 R4_XLR3 R4_XLR4: library part ERJ-3EKF1004V, "RES SMD 1M OHM 1% 1/10W 0603", Device Package="0603 (1608 Metric)", Manufacturer="Panasonic Electronic Components", Operating Temperature="-55°C ~ 155°C", Power (Watts)="0.1W, 1/10W", Ratings=AEC-Q200, Resistance="1 MOhms", Supplier Device Package=0603, Supplier Part Number 1=P1.00MHCT-ND, Temperature Coefficient=±100ppm/°C, Tolerance=±1%, ComponentLink1Description=Datasheet, ComponentLink1URL=https://industrial.panasonic.com/cdbs/www-data/pdf/RDA0000/AOA0000C304.pdf, ComponentLink2Description="DigiKey Link", ComponentLink2URL=https://www.digikey.com/en/products/detail/panasonic-electronic-components/ERJ-3EKF1004V/196033, Composition="Thick Film", Features="Automotive AEC-Q200", Height - Seated (Max)="0.022\" (0.55mm)", LastUpdated="2/9/2024 8:42:00 PM", Lifecycle Status=Active, Minimum Order=1, Number of Terminations=2, Package / Case="0603 (1608 Metric)", Packaging=TapeAndReel, Part Number=ERJ-3EKF1004V, Part Status=Active, PartId=25691, Price=0.01, Series=ERJ-3EK, Size / Dimension="0.063\" L x 0.031\" W (1.60mm x 0.80mm)", Supplier 1=DigiKey
R5_XLR1 R5_XLR2 R5_XLR3 R5_XLR4: library part AC0603FR-07150KL, "RES SMD 150K OHM 1% 1/10W 0603", Device Package="0603 (1608 Metric)", Manufacturer=Yageo, Operating Temperature="-55°C ~ 155°C", Power (Watts)="0.1W, 1/10W", Ratings=AEC-Q200, Supplier Device Package=0603, Supplier Part Number 1=YAG3567CT-ND, Temperature Coefficient=±100ppm/°C, Tolerance=±1%, ComponentLink1Description=Datasheet, ComponentLink1URL=https://www.yageo.com/upload/media/product/productsearch/datasheet/rchip/PYu-AC_51_RoHS_L_7.pdf, ComponentLink2Description="DigiKey Link", ComponentLink2URL=https://www.digikey.com/en/products/detail/yageo/AC0603FR-07150KL/5895795, Composition="Thick Film", Features="Automotive AEC-Q200, Moisture Resistant", Height - Seated (Max)="0.022\" (0.55mm)", LastUpdated="7/25/2024 9:19:23 AM", Lifecycle Status=Active, Minimum Order=1, Number of Terminations=2, Package / Case="0603 (1608 Metric)", Packaging=CutTape, Part Number=AC0603FR-07150KL, Part Status=Active, PartId=17374, Price=0.01, Resistance="150 kOhms", Series=AC, Size / Dimension="0.063\" L x 0.031\" W (1.60mm x 0.80mm)", Supplier 1=DigiKey
R8_XLR1 R8_XLR2 R8_XLR3 R8_XLR4 R11_XLR1 R11_XLR2 R11_XLR3 R11_XLR4 R17_XLR1 R17_XLR2 R17_XLR3 R17_XLR4 R19_XLR1 R19_XLR2 R19_XLR3 R19_XLR4: library part AC0603FR-0751KL, "RES SMD 51K OHM 1% 1/10W 0603", Device Package="0603 (1608 Metric)", Manufacturer=Yageo, Operating Temperature="-55°C ~ 155°C", Power (Watts)="0.1W, 1/10W", Ratings=AEC-Q200, Supplier Device Package=0603, Supplier Part Number 1=YAG3616CT-ND, Temperature Coefficient=±100ppm/°C, Tolerance=±1%, ComponentLink1Description=Datasheet, ComponentLink1URL=https://www.yageo.com/upload/media/product/productsearch/datasheet/rchip/PYu-AC_51_RoHS_L_7.pdf, ComponentLink2Description="DigiKey Link", ComponentLink2URL=https://www.digikey.com/en/products/detail/yageo/AC0603FR-0751KL/5896179, Composition="Thick Film", Features="Automotive AEC-Q200, Moisture Resistant", Height - Seated (Max)="0.022\" (0.55mm)", LastUpdated="7/25/2024 9:19:23 AM", Lifecycle Status=Active, Minimum Order=1, Number of Terminations=2, Package / Case="0603 (1608 Metric)", Packaging=CutTape, Part Number=AC0603FR-0751KL, Part Status=Active, PartId=17419, Price=0.01, Resistance="51 kOhms", Series=AC, Size / Dimension="0.063\" L x 0.031\" W (1.60mm x 0.80mm)", Supplier 1=DigiKey
X1_XLR1 X1_XLR2 X1_XLR3 X1_XLR4: library part PLD-8, CurrentMax=3A, Manufacturer=Connfly, VoltageMax=500VAC, CommentText="\"Разъем\"", HelpURL=https://www.chipdip.ru/product/pld-8-ds1021-2x4, Multichannel=8pin, PartNumber=PLD-8, Pitch=2.54mm, TypeConnector=Connector, ValueManufacturerPartNumber="Connector, 8pin, 2.54mm, 500VAC, 3A"

## Via types
v1: diameter 0.61, hole 0.305, Top Layer to Bottom Layer, 107 vias

## Nets (pads, with @x,y where several pads share a name; then routed paths per layer and width w, separated by ;. In a path a pad name is that pad's centre, name@x,y a point inside that pad or via, vN(x,y) a via of type N, cw(c..) or ccw(c..) an arc to the next point about the centre after c; other vN are vias at no path point)
+48V_Enabled: R16_XLR1.2 R16_XLR2.2 R16_XLR3.2 R16_XLR4.2 | length 107.4
  Top Layer w0.254: v1(49.523,58.032) 49.973,57.582 149.352,57.582
  Bottom Layer w0.254: R16_XLR4.2@48.768,61.722 48.768,61.672 49.041,61.399 49.091,61.399 49.53,60.96 49.53,58.039 v1(49.523,58.032) ; R16_XLR3.2@80.768,61.722 80.768,61.672 81.041,61.399 81.091,61.399 81.53,60.96 ; R16_XLR2.2@112.768,61.754 112.768,61.704 113.041,61.431 113.091,61.431 113.53,60.992 ; R16_XLR1.2@144.768,61.722 144.768,61.672 145.041,61.399 145.091,61.399 145.53,60.96
GND_A: C5_XLR1.1 C5_XLR2.1 C5_XLR3.1 C5_XLR4.1 C8_XLR1.2 C8_XLR2.2 C8_XLR3.2 C8_XLR4.2 C9_XLR1.2 C9_XLR2.2 C9_XLR3.2 C9_XLR4.2 C10_XLR1.1 C10_XLR2.1 C10_XLR3.1 C10_XLR4.1 C11_XLR1.1 C11_XLR2.1 C11_XLR3.1 C11_XLR4.1 C12_XLR1.2 C12_XLR2.2 C12_XLR3.2 C12_XLR4.2 D8.1 D8.2 D8_1.1 D8_1.2 D8_2.1 D8_2.2 D8_3.1 D8_3.2 D9.1 D9.2 D9_1.1 D9_1.2 D9_2.1 D9_2.2 D9_3.1 D9_3.2 J4_XLR1.1 J4_XLR1.4 J4_XLR2.1 J4_XLR2.4 J4_XLR3.1 J4_XLR3.4 J4_XLR4.1 J4_XLR4.4 MH9.0 MH10.0 MH11.0 MH12.0 R9_XLR1.1 R9_XLR2.1 R9_XLR3.1 R9_XLR4.1 R10_XLR1.1 R10_XLR2.1 R10_XLR3.1 R10_XLR4.1 R11_XLR1.1 R11_XLR2.1 R11_XLR3.1 R11_XLR4.1 R19_XLR1.2 R19_XLR2.2 R19_XLR3.2 R19_XLR4.2 X1_XLR1.1 X1_XLR1.7 X1_XLR2.1 X1_XLR2.7 X1_XLR3.1 X1_XLR3.7 X1_XLR4.1 X1_XLR4.7 | length 55.7
  Bottom Layer w0.203: v1(51.816,72.898) v1(53.34,72.898) ; C11_XLR4.1@57.867,65.786 v1(59.436,65.786) ; v1(59.182,58.928) 59.69,58.42 C9_XLR4.2@60.581,58.42 ; R10_XLR4.1@64.09,60.276 64.262,60.104 v1(64.262,59.436) ; v1(83.816,72.898) v1(85.34,72.898) ; C11_XLR3.1@89.867,65.786 v1(91.436,65.786) ; v1(91.182,58.928) 91.69,58.42 C9_XLR3.2@92.581,58.42 ; R10_XLR3.1@96.09,60.276 96.262,60.104 v1(96.262,59.436) ; v1(115.816,72.93) v1(117.34,72.93) ; C11_XLR2.1@121.867,65.818 v1(123.436,65.818) ; v1(123.182,58.96) 123.69,58.452 C9_XLR2.2@124.581,58.452 ; R10_XLR2.1@128.09,60.308 128.262,60.136 v1(128.262,59.468) ; v1(147.816,72.898) v1(149.34,72.898) ; C11_XLR1.1@153.867,65.786 v1(155.436,65.786) ; R10_XLR1.1@160.09,60.276 160.262,60.104 v1(160.262,59.436)
  Bottom Layer w0.254: C12_XLR4.2@43.18,63.364 44.614,63.364 v1(44.642,63.392) ; C5_XLR4.1@51.771,71.708 51.771,72.853 v1(51.816,72.898) ; R11_XLR4.1@53.295,71.804 53.295,72.853 v1(53.34,72.898) ; v1(54.864,70.358) C10_XLR4.1@54.864,71.374 ; C8_XLR4.2@63.963,68.406 64.013,68.406 64.336,68.083 64.336,67.998 64.498,67.836 64.6,67.836 64.956,67.48 64.956,67.378 v1(65.024,67.31) ; R19_XLR4.2@65.663,65.532 65.663,66.719 v1(65.682,66.739) ; v1(67.056,72.644) 67.056,72.548 67.187,72.417 R9_XLR4.1@67.187,71.628 ; C12_XLR3.2@75.18,63.364 76.614,63.364 v1(76.642,63.392) ; C5_XLR3.1@83.771,71.708 83.771,72.853 v1(83.816,72.898) ; R11_XLR3.1@85.295,71.804 85.295,72.853 v1(85.34,72.898) ; v1(86.864,70.358) C10_XLR3.1@86.864,71.374 ; C8_XLR3.2@95.963,68.406 96.013,68.406 96.336,68.083 96.336,67.998 96.498,67.836 96.6,67.836 96.956,67.48 96.956,67.378 v1(97.024,67.31) ; R19_XLR3.2@97.663,65.532 97.663,66.719 v1(97.682,66.739) ; v1(99.056,72.644) 99.056,72.548 99.187,72.417 R9_XLR3.1@99.187,71.628 ; C12_XLR2.2@107.18,63.396 108.614,63.396 v1(108.642,63.424) ; C5_XLR2.1@115.771,71.74 115.771,72.885 v1(115.816,72.93) ; R11_XLR2.1@117.295,71.836 117.295,72.885 v1(117.34,72.93) ; v1(118.864,70.39) C10_XLR2.1@118.864,71.406 ; C8_XLR2.2@127.963,68.438 128.013,68.438 128.336,68.115 128.336,68.03 128.498,67.868 128.6,67.868 128.956,67.512 128.956,67.41 v1(129.024,67.342) ; R19_XLR2.2@129.663,65.564 129.663,66.751 v1(129.682,66.771) ; v1(131.056,72.676) 131.056,72.58 131.187,72.449 R9_XLR2.1@131.187,71.66 ; C12_XLR1.2@139.18,63.364 140.614,63.364 v1(140.642,63.392) ; C5_XLR1.1@147.771,71.708 147.771,72.853 v1(147.816,72.898) ; R11_XLR1.1@149.295,71.804 149.295,72.853 v1(149.34,72.898) ; v1(150.864,70.358) C10_XLR1.1@150.864,71.374 ; C8_XLR1.2@159.963,68.406 160.013,68.406 160.336,68.083 160.336,67.998 160.498,67.836 160.6,67.836 160.956,67.48 160.956,67.378 v1(161.024,67.31) ; R19_XLR1.2@161.663,65.532 161.663,66.719 v1(161.682,66.739) ; v1(163.056,72.644) 163.056,72.548 163.187,72.417 R9_XLR1.1@163.187,71.628
  other v1: 58.674,63.5 46.455,63.694 51.562,65.278 59.944,69.596 46.482,75.946 55.118,76.2 46.736,77.978 54.864,78.232 50.8,80.772 46.99,82.296
Line_IN_XLR1: C14_XLR1.2 X1_XLR1.3 | length 34.5
  Top Layer w0.254: 141.085,85.471 144.006,82.55 144.006,81.788 150.61,75.184 150.61,72.644 151.866,71.388 151.866,64.087 v1(146.885,59.106)
  Bottom Layer w0.254: C14_XLR1.2@146.755,60.626 146.885,60.496 v1(146.885,59.106)
Line_IN_XLR2: C14_XLR2.2 X1_XLR2.3 | length 34.5
  Top Layer w0.254: 109.085,85.503 112.006,82.582 112.006,81.82 118.61,75.216 118.61,72.676 119.866,71.42 119.866,64.119 v1(114.885,59.138)
  Bottom Layer w0.254: C14_XLR2.2@114.755,60.658 114.885,60.528 v1(114.885,59.138)
Line_IN_XLR3: C14_XLR3.2 X1_XLR3.3 | length 34.5
  Top Layer w0.254: 77.085,85.471 80.006,82.55 80.006,81.788 86.61,75.184 86.61,72.644 87.866,71.388 87.866,64.087 v1(82.885,59.106)
  Bottom Layer w0.254: C14_XLR3.2@82.755,60.626 82.885,60.496 v1(82.885,59.106)
Line_IN_XLR4: C14_XLR4.2 X1_XLR4.3 | length 34.5
  Top Layer w0.254: 45.085,85.471 48.006,82.55 48.006,81.788 54.61,75.184 54.61,72.644 55.866,71.388 55.866,64.087 v1(50.885,59.106)
  Bottom Layer w0.254: C14_XLR4.2@50.755,60.626 50.885,60.496 v1(50.885,59.106)